# Altium PCB Reciever.PcbDoc
Units mm, origin at the board's own origin, x right, y up, seen from the top; angles counter-clockwise.
Board outline 152.4 x 101.6 mm, 2 copper layers (Top Layer, Bottom Layer); 50 components, 37 nets, 136 pads, 0 vias.
Unrouted connection lines stored in the file: 2.
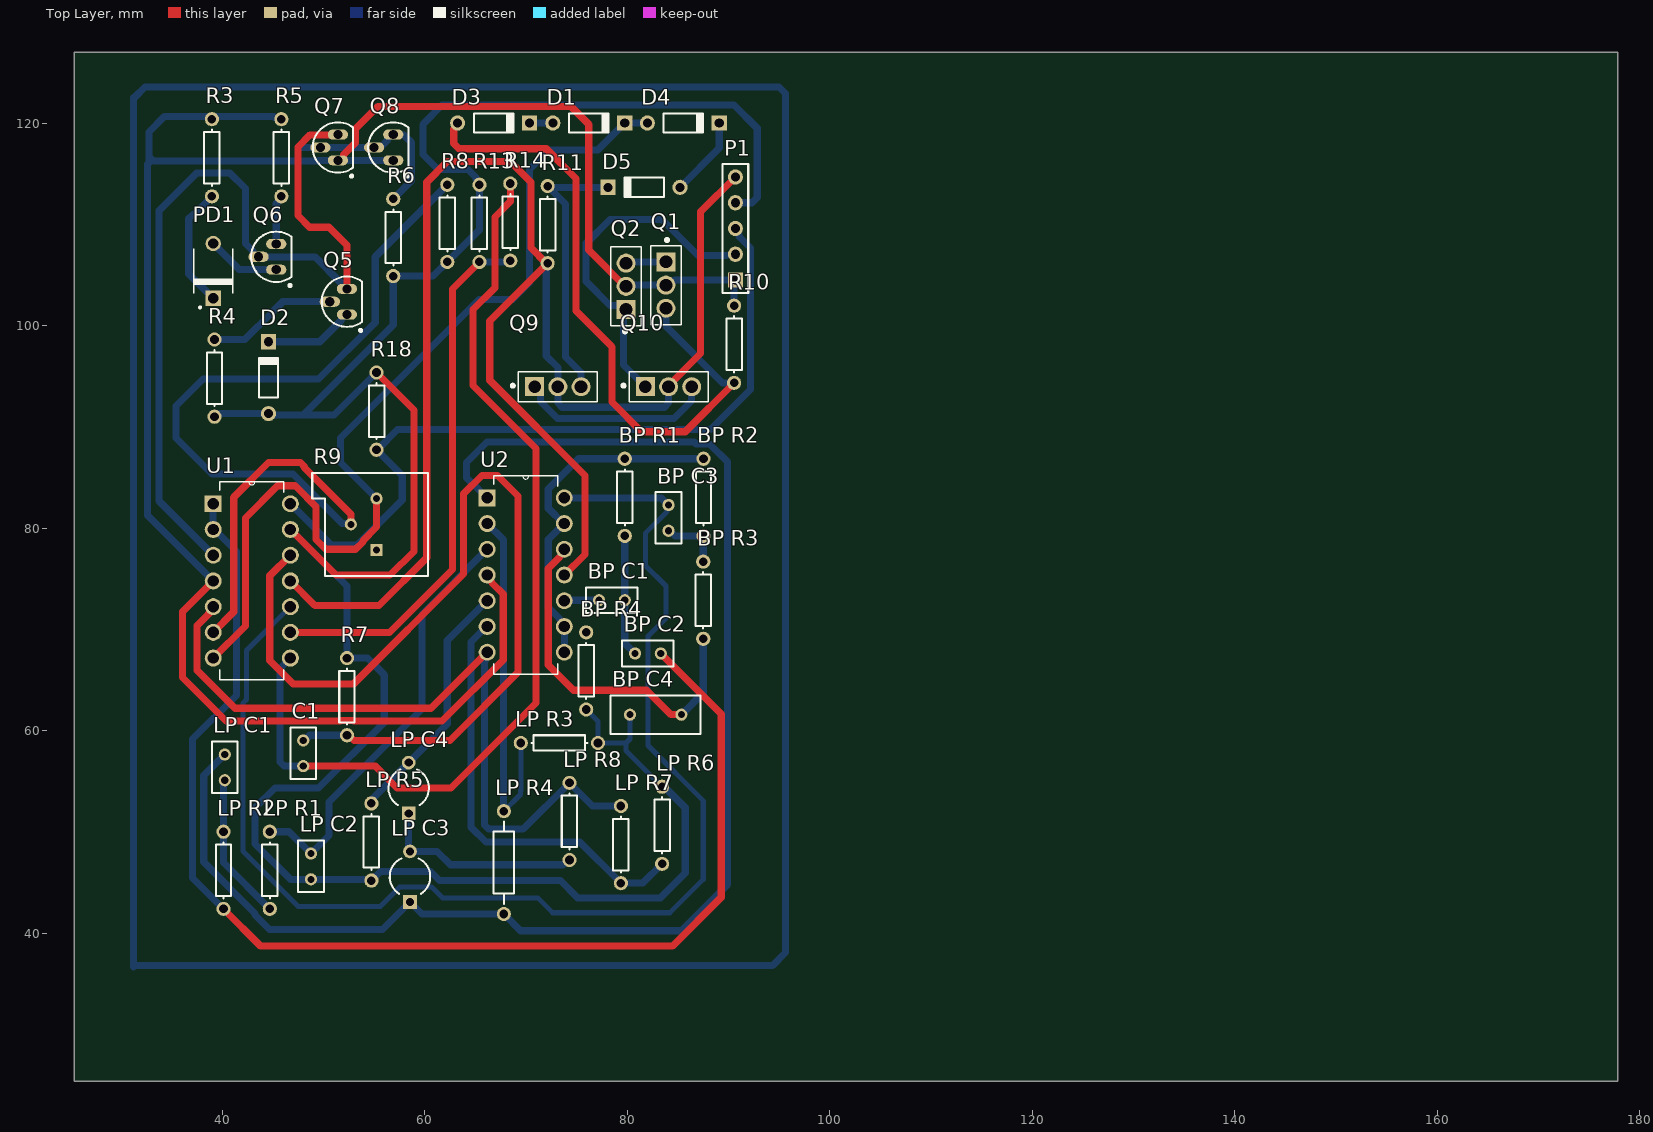
[diagram p0: Top Layer view]
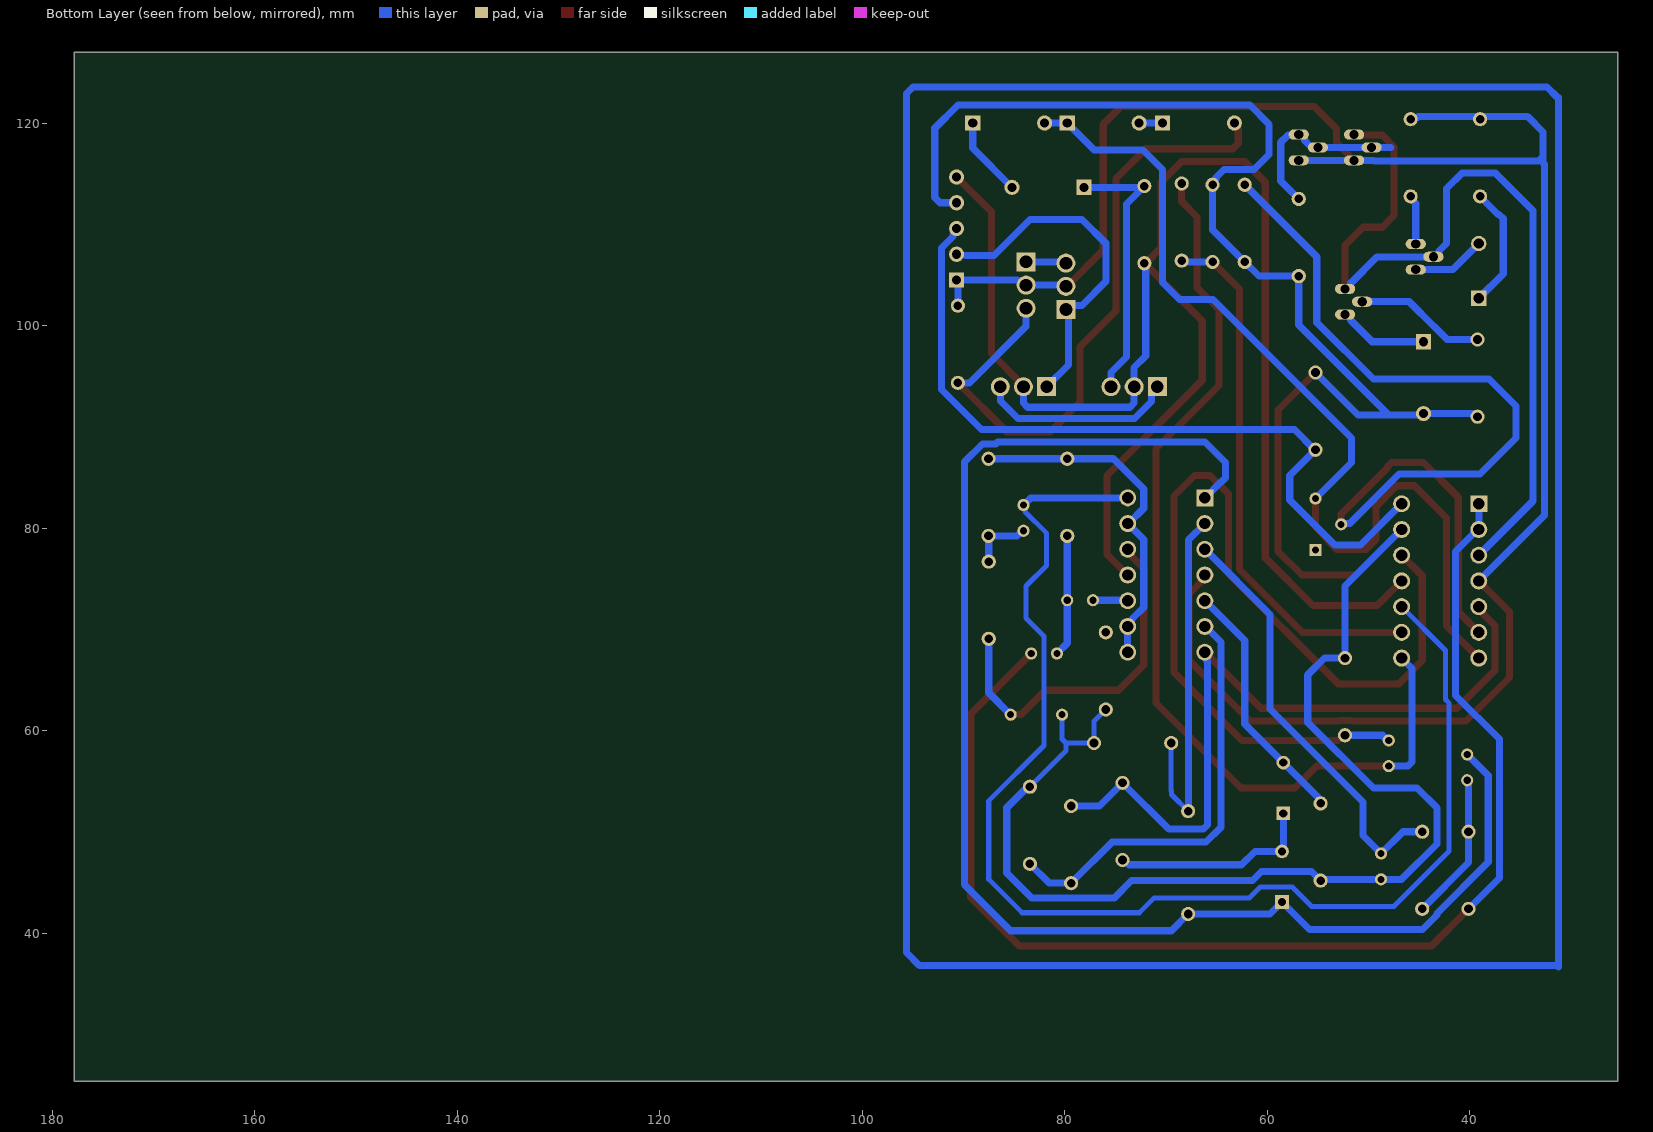
[diagram p1: Bottom Layer view, seen from below]

## Layer stack, top to bottom
Top Solder: solder mask 0.0102, Solder Resist, Dk 3.5
Top Layer: signal copper 0.0356
Dielectric 1: dielectric 0.32, FR-4, Dk 4.8
Bottom Layer: signal copper 0.0356
Bottom Solder: solder mask 0.0102, Solder Resist, Dk 3.5

## Board outline
25.4,25.4 177.8,25.4 177.8,127 25.4,127

## Design rules (kind name [scope] priority, off if disabled: settings)
Clearance [All] p1: gap=0.4 ignorepadtopadclearanceinfootprint=FALSE
PolygonConnect [All] p1: connectstyle=Relief reliefconductorwidth=0.254 reliefentries=4 polygonreliefangle="90 Angle" airgapwidth=0.254
RoutingVias [All] p1: holewidth=0.711 width=1.27 viastyle="Through Hole" minholewidth=0.711 minwidth=1.27 maxholewidth=0.711 maxwidth=1.27
SolderMaskExpansion [All] p1: expansion=0.102
Width [All] p1: maxlimit=1 minlimit=0.5 preferedwidth=0.7
30 further rules are at their usual default settings.

## Classes and differential pairs
component class Sheet3: "BP C1" "BP C2" "BP C3" "BP C4" "BP R1" "BP R2" "BP R3" "BP R4" C1 D1 D3 D4 D5 "LP C1" "LP C2" "LP C3" "LP C4" "LP R1" "LP R2" "LP R3" "LP R4" "LP R5" "LP R6" "LP R7" "LP R8" PD1 Q5 Q6 Q7 Q8 Q9 Q10 R7 R8 R9 R10 R11 R13 R14 R18

## Components (designator, comment, footprint, x,y, rotation, side; value= is the part's Value field where it differs from the comment)
"BP C1" "Cap" RAD-0.1 78.486,72.898 r0 top value=100pF
"BP C2" "Cap" RAD-0.1 82.042,67.639 r0 top value=100pF
"BP C3" "Cap" RAD-0.1 84.074,81.026 r270 top value=100pF
"BP C4" "Cap" RAD-0.2 82.804,61.595 r180 top value=100pF
"BP R1" "Res1" AXIAL-0.3 79.756,83.058 r90 top value=1K
"BP R2" "Res1" AXIAL-0.3 87.53,83.058 r90 top value=1K
"BP R3" "Res1" AXIAL-0.3 87.503,72.898 r90 top value=1K
"BP R4" "Res1" AXIAL-0.3 75.946,65.913 r90 top value=1K
C1 "Cap" RAD-0.1 48.006,57.785 r90 top value=100pF
D1 "Diode 1N4148" DO-35 76.2,120.015 r0 top
D2 "Diode 1N4148" DO-35 44.577,94.869 r90 top
D3 "Diode 1N4148" DO-35 66.802,120.015 r0 top
D4 "Diode 1N4148" DO-35 85.535,120.015 r0 top
D5 "Diode 1N4148" DO-35 81.661,113.665 r180 top
"LP C1" "Cap" RAD-0.1 40.259,56.388 r90 top value=100pF
"LP C2" "Cap" RAD-0.1 48.768,46.609 r90 top value=100pF
"LP C3" "Cap2" CAPR5-4X5 58.547,45.593 r90 top value=100pF
"LP C4" "Cap2" CAPR5-4X5 58.42,54.356 r90 top value=100pF
"LP R1" "Res1" AXIAL-0.3 44.704,46.228 r90 top value=1K
"LP R2" "Res1" AXIAL-0.3 40.132,46.228 r90 top value=1K
"LP R3" "Res1" AXIAL-0.3 73.299,58.801 r180 top value=1K
"LP R4" "Res1" AXIAL-0.4 67.818,46.99 r90 top value=1K
"LP R5" "Res1" AXIAL-0.3 54.737,49.022 r270 top value=1K
"LP R6" "Res1" AXIAL-0.3 83.439,50.673 r90 top value=1K
"LP R7" "Res1" AXIAL-0.3 79.375,48.768 r270 top value=1K
"LP R8" "Res1" AXIAL-0.3 74.295,51.054 r90 top value=1K
P1 "Header 5" HDR1X5 90.678,104.521 r90 top
PD1 "BPW34F" *PHODET_BPW34F_BPW34F(Primary) 39.116,105.41 r90 top
Q1 "BD135" *TO229P780X300X2000-3 83.82,106.303 r270 top
Q2 "BD135" *TO229P780X300X2000-3 79.883,101.6 r90 top
Q5 "2N3904" TO-92A#1 52.324,102.374 r0 top
Q6 "2N3904" TO-92A#2 45.339,106.807 r0 top
Q7 "2N3906" TO-92A#3 51.435,117.602 r0 top
Q8 "2N3906" TO-92A#4 56.896,117.602 r0 top
Q9 "BD136" *TO229P780X300X2000-3 70.858,93.98 r0 top
Q10 "BD136" *TO229P780X300X2000-3 81.788,93.98 r0 top
R3 "Res1" AXIAL-0.3 38.989,116.586 r90 top value=1K
R4 "Res1" AXIAL-0.3 39.243,94.826 r90 top value=1K
R5 "Res1" AXIAL-0.3 45.847,116.586 r90 top value=1K
R6 "Res1" AXIAL-0.3 56.896,108.712 r90 top value=1K
R7 "Res1" AXIAL-0.3 52.324,63.373 r270 top value=1K
R8 "Res1" AXIAL-0.3 62.23,110.109 r90 top value=1K
R9 "RPot" VR4 53.975,80.391 r90 top value=1K
R10 "Res1" AXIAL-0.3 90.551,98.171 r90 top value=1K
R11 "Res1" AXIAL-0.3 72.136,109.982 r90 top value=1K
R13 "Res1" AXIAL-0.3 65.405,110.109 r270 top value=1K
R14 "Res1" AXIAL-0.3 68.453,110.236 r90 top value=1K
R18 "Res1" AXIAL-0.3 55.245,91.567 r90 top value=1K
U1 "LM324N" *DIP254P762X508-14 46.736,67.183 r0 top
U2 "LM324N" *DIP254P762X508-14 73.787,67.766 r0 top

## Footprints (in the part's own frame and the unit in brackets; to place one, negate y for a bottom-side part, rotate by r counter-clockwise, add the part's x,y. Pads: shape width x height; smd on the part's side, far side on the other; paste and mask are expansions set on the pad)
*DIP254P762X508-14 [mil]
  rect 66x66 hole 44: 1(-300,600)
  round 66 hole 44: 2(-300,500) 3(-300,400) 4(-300,300) 5(-300,200) 6(-300,100) 7(-300,0) 8(0,0) 9(0,100) 10(0,200) 11(0,300) 12(0,400) 13(0,500) 14(0,600)
  silkscreen extent -275,-85 -25,685
*PHODET_BPW34F_BPW34F(Primary) [mm]
  round 1.508 hole 1: A(2.7,0)
  rect 1.508x1.508 hole 1: C(-2.7,0)
  silkscreen extent -3.7,-1.93 2.2,1.92
*TO229P780X300X2000-3 [mm]
  rect 1.875x1.875 hole 1.25: 1(0,0)
  round 1.875 hole 1.25: 2(2.29,0) 3(4.58,0)
  silkscreen extent -2.31,-1.5 6.19,1.5
AXIAL-0.3 [mm] "Axial Device, Thru-Hole; 2 Leads; 0.3 in Pin Spacing"
  round 1.4 hole 0.85: 1(-3.81,0) 2(3.81,0)
  silkscreen extent -2.77,-0.76 2.77,0.76
AXIAL-0.4 [mm] "Axial Device, Thru-Hole; 2 Leads; 0.4 in Pin Spacing"
  round 1.4 hole 0.85: 1(-5.08,0) 2(5.08,0)
  silkscreen extent -4.06,-1.02 4.06,1.02
CAPR5-4X5 [mm] "Capacitor; 2 Leads"
  rect 1.35x1.35 hole 0.8: 1(-2.5,0)
  round 1.35 hole 0.8: 2(2.5,0)
  silkscreen extent -1.69,-2 1.82,2
DO-35 [mm] "Diode, Axial; Body 3.8 x 1.9 mm (LxDia. max), Lead Dia. 0.53 mm (max)"
  round 1.5 hole 0.9: 1(-3.55,0)
  rect 1.5x1.5 hole 0.9: 2(3.55,0)
  silkscreen extent -1.95,-0.95 2.05,0.95
HDR1X5 [mm] "Connector; Header; 5 Position"
  rect 1.5x1.5 hole 0.9: 1(0,0)
  round 1.5 hole 0.9: 2(2.54,0) 3(5.08,0) 4(7.62,0) 5(10.16,0)
  silkscreen extent -1.27,-1.27 11.43,1.27
RAD-0.1 [mm] "Radial Cap, Thru-Hole; 2 Leads; 0.1 in Pin Spacing"
  round 1.2 hole 0.7: 1(-1.27,0) 2(1.27,0)
  silkscreen extent -2.54,-1.27 2.54,1.27
RAD-0.2 [mm] "Radial Cap, Thru-Hole; 2 Leads; 0.2 in Pin Spacing"
  round 1.2 hole 0.7: 1(-2.54,0) 2(2.54,0)
  silkscreen extent -4.44,-1.91 4.44,1.91
TO-92A#1 [mm] "TO, Flat Index; 3 In-Line, Axial Leads; Body Dia. 4.5mm; Leads 0.51 x 0.48 mm (max)"
  oval 2x1 hole 0.9: 1(0,-1.27) 2(-1.695,0) 3(0,1.27)
  silkscreen extent -2.48,-2.95 1.5,2.48, body extent -2.48,-2.5 1.5,2.5, height 6.86
TO-92A#2 [mm] "TO, Flat Index; 3 In-Line, Axial Leads; Body Dia. 4.5mm; Leads 0.51 x 0.48 mm (max)"
  oval 2x1 hole 0.9: 1(0,-1.27) 2(-1.745,0) 3(0,1.27)
  silkscreen extent -2.48,-2.95 1.5,2.48, body extent -2.48,-2.5 1.5,2.5, height 6.86
TO-92A#3 [mm] "TO, Flat Index; 3 In-Line, Axial Leads; Body Dia. 4.5mm; Leads 0.51 x 0.48 mm (max)"
  oval 2x1 hole 0.9: 1(0,-1.27) 2(-1.73,0) 3(0,1.27)
  silkscreen extent -2.48,-2.95 1.5,2.48, body extent -2.48,-2.5 1.5,2.5, height 6.86
TO-92A#4 [mm] "TO, Flat Index; 3 In-Line, Axial Leads; Body Dia. 4.5mm; Leads 0.51 x 0.48 mm (max)"
  oval 2x1 hole 0.9: 1(0,-1.27) 2(-1.896,0) 3(0,1.27)
  silkscreen extent -2.48,-2.95 1.5,2.48, body extent -2.48,-2.5 1.5,2.5, height 6.86
VR4 [mm] "Thru-Hole; 3 Leads"
  rect 1.2x1.2 hole 0.7: 1(-2.54,-1.27)
  round 1.2 hole 0.7: 2(0,1.27) 3(2.54,-1.27)
  silkscreen extent -5.08,-6.35 5.08,5.08

## Part data
"BP C1" "BP C2" "BP C3" "BP C4" C1 "LP C1" "LP C2" "LP C3" "LP C4": "Capacitor", Publisher="Altium Limited"
  "BP C1" "BP C2" "BP C3" "BP C4" C1 "LP C1" "LP C2": LatestRevisionDate=17-Jul-2002, LatestRevisionNote="Re-released for DXP Platform.", PackageDescription="Radial Cap, Thru-Hole; 2 Leads; 0.3 in Pin Spacing", PackageReference=RAD-0.3, Published=8-Jun-2000
  "LP C3" "LP C4": PackageDescription="Capacitor; 2 Leads", PackageReference=CAPR5-4X5, Published=23-Sep-2002
"BP R1" "BP R2" "BP R3" "BP R4" "LP R1" "LP R2" "LP R3" "LP R4" "LP R5" "LP R6" "LP R7" "LP R8" R3 R4 R5 R6 R7 R8 R10 R11 R13 R14 R18: "Resistor", LatestRevisionDate=17-Jul-2002, LatestRevisionNote="Re-released for DXP Platform.", PackageDescription="Axial Device, Thru-Hole; 2 Leads; 0.3 in Pin Spacing", PackageReference=AXIAL-0.3, Published=8-Jun-2000, Publisher="Altium Limited"
D1 D2 D3 D4 D5: "High Conductance Fast Diode", Code_JEDEC=DO-204-AH, ComponentLink1Description="Manufacturer Link", ComponentLink1URL=http://www.fairchildsemi.com/, ComponentLink2Description=Datasheet, ComponentLink2URL=http://www.fairchildsemi.com/ds/1N%2F1N4148.pdf, DatasheetVersion=1997, LatestRevisionDate=17-Jul-2002, LatestRevisionNote="Re-released for DXP Platform.", PackageDescription="Diode, Axial; Body 3.8 x 1.9 mm (LxDia. max), Lead Dia. 0.53 mm (max)", PackageReference=DO-35, Published=8-Jun-2000, Publisher="Altium Limited"
P1: "Header, 5-Pin", LatestRevisionDate=17-Jul-2002, LatestRevisionNote="Re-released for DXP Platform.", Publisher="Altium Limited"
PD1: "Photodiode PIN Chip 950nm 0.59A/W Sensitivity Automotive 2-Pin PDIL", Package="DIP-2 OSRAM", Availability=Unavailable, MF="OSRAM Opto", MP=BPW34F, Price=None, SnapEDA_Link=https://www.snapeda.com/parts/BPW34F/OSRAM%20Opto%20Semiconductors%20Inc./view-part/?ref=snap
Q1 Q2: "Trans GP BJT NPN 45V 1.5A 3-Pin TO-126", Package="TO-126-3 NXP Semiconductors", Availability=Unavailable, MF="ON Semiconductor", MP=BD135, Price=None, SnapEDA_Link=https://www.snapeda.com/parts/BD135/ON%20Semiconductor/view-part/?ref=snap
Q5 Q6: "NPN General Purpose Amplifier", ComponentLink1Description="Manufacturer Link", ComponentLink1URL=http://www.fairchildsemi.com/, ComponentLink2Description=Datasheet, ComponentLink2URL=http://www.fairchildsemi.com/ds/2N%2F2N3904.pdf, DatasheetVersion=1997, LatestRevisionDate=15-Jan-2003, LatestRevisionNote="PCB Footprint 'BCY-W3/D4.7' replaced", PackageDescription="TO, Flat Index; 3 In-Line, Axial Leads; Body Dia. 4.5mm; Leads 0.51 x 0.48 mm (max)", PackageReference=TO-92A, PackageVersion=Sep-1998, Published=8-Jun-2000, Publisher="Altium Limited"
Q7 Q8: "PNP General Purpose Amplifier", ComponentLink1Description="Manufacturer Link", ComponentLink1URL=http://www.fairchildsemi.com/, ComponentLink2Description=Datasheet, ComponentLink2URL=http://www.fairchildsemi.com/ds/2N%2F2N3906.pdf, DatasheetVersion=1997, LatestRevisionDate=15-Jan-2003, LatestRevisionNote="PCB Footprint 'BCY-W3/D4.7' replaced", PackageDescription="TO, Flat Index; 3 In-Line, Axial Leads; Body Dia. 4.5mm; Leads 0.51 x 0.48 mm (max)", PackageReference=TO-92A, PackageVersion=Sep-1998, Published=8-Jun-2000, Publisher="Altium Limited"
Q9 Q10: "Bipolar Transistor, PNP, -45V", Package="TO-126 Multicomp", Availability=Unavailable, MF="ON Semiconductor", MP=BD136, Price=None, SnapEDA_Link=https://www.snapeda.com/parts/BD136/ON%20Semiconductor/view-part/?ref=snap
R9: "Potentiometer", LatestRevisionDate=17-Jul-2002, LatestRevisionNote="Re-released for DXP Platform.", PackageDescription="Variable Resistor, Thru-Hole; 3 Leads", PackageReference=VR5, Published=8-Jun-2000, Publisher="Altium Limited", Set Position=0.5, Sim Note="Enter the Resistance value and the set point into parameter fields."
U1 U2: "Ic Opamp Gp 1.2mhz 14dip", Package="PDIP-14 Motorola", Availability=Unavailable, MF="ON Semiconductor", MP=LM324N, Price=None, SnapEDA_Link=https://www.snapeda.com/parts/LM324N/ON%20Semiconductor/view-part/?ref=snap

## Nets (pads, with @x,y where several pads share a name; then routed paths per layer and width w, separated by ;. In a path a pad name is that pad's centre, name@x,y a point inside that pad or via, vN(x,y) a via of type N, cw(c..) or ccw(c..) an arc to the next point about the centre after c; other vN are vias at no path point)
Audio: P1.2 Q2.1 Q10.1 | length 34.6
  Bottom Layer w0.7: Q10.1@82.375,94.567 Q10.1 79.629,96.139 79.629,101.346 Q2.1 79.496,101.987 78.31,101.987 75.946,104.351 75.946,108.141 78.295,110.49 83.439,110.49 86.995,106.934 89.789,106.934
"BP U1 +": "BP C1.1" "BP R4.2" U2.10 | length 3.8
  Bottom Layer w0.7: U2.10 73.839,72.898 77.216,72.898 ; 75.757,69.723 75.946,69.723 75.946,69.912
"BP U1 -": "BP R1.2" "BP R2.2" U2.8 U2.9 U2.13 | length 34.7
  Bottom Layer w0.7: U2.8 U2.9 73.787,70.57 73.299,71.058 73.299,71.088 72.199,72.188 72.199,78.877 U2.13 73.712,80.466 72.199,81.979 72.199,83.883 75.184,86.868 79.756,86.868 87.53,86.868
"BP U2 +": "BP C4.1" "BP R3.1" U2.12 | length 35.7
  Top Layer w0.7: U2.12 73.787,77.661 73.299,77.173 73.299,77.144 72.199,76.043 72.199,66.485 74.676,64.008 81.915,64.008 84.328,61.595 85.344,61.595
  Bottom Layer w0.7: 85.344,61.595 87.503,63.754 87.503,69.088
"BP U2 -": "BP C3.1" U1.10 U2.14 | length 130
  Top Layer w0.7: U1.10 U1.10@46.879,72.12
  Bottom Layer w0.5: U1.10 42.402,67.929 42.402,63.086 42.037,62.721 42.037,48.133 47.498,42.672 55.626,42.672 57.531,44.577 60.689,44.577 61.758,43.508 71.173,43.508 72.644,42.037 84.201,42.037 87.503,45.339 87.503,53.086 82.042,58.547 82.042,69.342 83.82,71.12 83.82,74.295 81.788,76.327 81.788,79.502 83.94,81.654 83.94,82.162 84.074,82.296
  Bottom Layer w0.7: U1.10@46.472,72.263 U1.10 ; U2.14@73.576,83.006 U2.14 83.364,83.006 84.074,82.296
Data: P1.3 R18.1 U1.14 | length 76.5
  Bottom Layer w0.7: U1.14 50.8,78.359 53.34,78.359 57.785,82.804 57.785,85.217 R18.1 55.327,87.757 57.322,89.752 88.228,89.752 92.178,93.702 92.178,107.682 91.041,108.819 91.041,109.021 90.678,109.385 P1.3
GND: "BP C4.2" "BP R4.1" "LP C2.1" "LP R3.1" "LP R5.2" "LP R6.2" D2.1 P1.4 R4.1 R6.1 R7.1 R8.1 R13.1 R18.2 U1.13 | length 253.5
  Top Layer w0.7: U1.13 51.233,75.386 56.59,75.386 58.928,77.724 58.928,91.694 R18.2
  Bottom Layer w0.5: 75.946,62.103 77.109,60.94 77.109,58.801 79.883,58.801 ; 80.264,61.595 80.264,59.182 79.883,58.801 ; 83.439,54.483 79.883,58.039 79.883,58.801
  Bottom Layer w0.7: R4.1 39.432,91.016 39.735,91.319 D2.1 ; D2.1@44.577,91.192 48.012,91.192 ; U1.13 52.324,74.295 R7.1 54.356,67.183 56.007,65.532 56.007,60.833 49.53,54.356 45.212,54.356 43.254,52.398 43.254,48.821 46.736,45.339 48.768,45.339 54.61,45.339 54.737,45.212 55.626,46.101 60.579,46.101 61.468,45.212 73.406,45.212 75.11,43.508 83.259,43.508 85.725,45.974 85.725,52.408 84,54.133 83.978,54.133 83.628,54.483 83.439,54.483 ; R18.2 51.06,91.192 48.012,91.192 ; P1.4 92.329,112.141 92.837,112.649 92.837,119.507 90.551,121.793 61.722,121.793 59.817,119.888 59.817,116.924 61.298,115.443 64.262,115.443 65.058,114.647 65.058,114.455 65.405,114.108 R13.1 65.405,109.474 R8.1 60.833,104.902 R6.1 56.896,100.076 48.012,91.192
"LP U1 +": "LP C2.2" "LP R1.2" U2.3 | length 42.2
  Bottom Layer w0.7: 44.704,50.038 46.609,50.038 48.768,47.879 50.546,49.657 50.546,52.959 59.733,62.146 59.733,71.492 U2.3
"LP U1 -": "LP R3.2" "LP R4.2" U2.2 | length 36.5
  Bottom Layer w0.5: 67.818,52.07 69.469,53.721 69.469,54.102 69.489,54.122 69.489,58.801
  Bottom Layer w0.7: U2.2 67.799,78.834 67.799,52.089 67.818,52.07
"LP U1 out": "LP C1.2" "LP C3.1" "LP R4.1" U2.1 | length 143.7
  Bottom Layer w0.7: 40.259,57.658 38.184,55.583 38.184,47.033 43.254,41.963 43.254,41.817 44.685,40.386 55.84,40.386 58.547,43.093 59.73,41.91 67.818,41.91 69.469,40.259 85.344,40.259 89.916,44.831 89.916,86.533 88.131,88.318 86.815,88.318 86.614,88.519 66.167,88.519 64.135,86.487 64.135,84.992 64.545,84.582 64.591,84.582 U2.1
"LP U2 +": "LP C4.2" "LP R5.1" U2.5 | length 24.7
  Bottom Layer w0.7: 54.737,52.832 54.871,52.966 54.871,53.307 58.42,56.856 62.23,60.666 62.23,68.909 U2.5
"LP U2 -": "LP R6.1" "LP R7.2" U2.6 | length 42.5
  Bottom Layer w0.7: U2.6 66.113,70.306 64.579,68.771 64.579,50.481 66.037,49.022 75.311,49.022 79.375,44.958 81.534,44.958 83.439,46.863
"LP U2 out": "LP R7.1" "LP R8.2" U1.5 U2.7 | length 73.3
  Top Layer w0.7: U1.5 39.116,71.999 38.628,71.511 38.628,71.481 37.528,70.381 37.528,65.976 41.274,62.23 60.631,62.23 U2.7
  Bottom Layer w0.7: U2.7@65.903,67.766 U2.7 65.98,67.579 65.98,66.935 65.913,66.867 65.913,50.702 66.323,50.292 69.723,50.292 74.295,54.864 76.581,52.578 79.375,52.578
"NetBP C1_2": "BP C1.2" "BP C2.1" "BP R1.1" | length 12
  Bottom Layer w0.7: 79.756,79.248 79.756,72.898 79.756,68.655 80.772,67.639
"NetBP C3_2": "BP C3.2" "BP R2.1" "BP R3.2" | length 6.2
  Bottom Layer w0.7: 84.074,79.756 84.209,79.756 84.717,79.248 87.53,79.248 87.503,79.221 87.503,76.708
NetD1_1: D1.1 D3.2 | length 2.3
  Bottom Layer w0.7: D3.2 D1.1
NetD2_2: D2.2 Q5.1 | length 9.1
  Bottom Layer w0.7: D2.2 49.639,98.419 51.767,100.546 51.767,100.965 51.905,101.104 Q5.1
NetD3_1: D3.1 Q1.3 R10.1 | length 65.3
  Top Layer w0.7: D3.1 63.252,119.799 62.865,119.412 62.865,117.983 63.373,117.475 72.009,117.475 74.93,114.554 74.93,101.473 78.486,97.917 78.486,92.456 81.407,89.535 85.725,89.535 R10.1
  Bottom Layer w0.7: Q1.3 83.82,99.949 89.408,94.361 R10.1
NetD4_2: D4.2 D5.1 | length 8
  Bottom Layer w0.7: D5.1 89.085,117.539 D4.2
NetD5_2: D5.2 Q9.3 R11.2 | length 27
  Bottom Layer w0.7: R11.2 R11.2@72.263,113.665 ; Q9.3 75.431,93.987 75.431,95.384 73.914,96.901 73.914,112.014 R11.2@72.263,113.665 ; D5.2 R11.2@72.263,113.665
"NetLP C1_1": "LP C1.1" "LP R1.1" "LP R2.2" | length 14.6
  Bottom Layer w0.7: 40.259,55.118 40.259,54.983 40.132,54.856 40.132,50.038 40.132,46.99 44.704,42.418
"NetLP C3_2": "LP C3.2" "LP C4.1" "LP R8.1" | length 20.3
  Bottom Layer w0.7: 58.42,51.856 58.42,48.396 58.547,48.269 58.547,48.093 61.222,48.093 62.536,46.779 73.641,46.779 74.106,47.244 74.295,47.244
NetPD1_A: PD1.A Q5.2 Q6.1 R4.2 | length 20.4
  Bottom Layer w0.7: R4.2@38.989,98.806 R4.2@39.123,98.94 ; PD1.A 41.689,105.537 Q6.1 ; R4.2 42.233,98.636 43.516,99.919 43.531,99.919 45.986,102.374 Q5.2
NetPD1_C: PD1.C R3.1 | length 12.1
  Bottom Layer w0.7: R3.1 37.211,110.998 37.113,110.998 36.703,110.588 36.703,105.123 PD1.C
NetQ1_1: Q1.1 Q2.3 | length 4
  Bottom Layer w0.7: Q2.3 80.006,106.303 Q1.1
NetQ6_3: Q6.3 R5.1 | length 4.9
  Bottom Layer w0.7: Q6.3 45.339,112.079 45.847,112.587 R5.1
NetQ7_2: Q7.2 Q8.2 Q8.3 R6.2 | length 18.3
  Bottom Layer w0.7: 47.8,117.602 Q8.2 55.581,117.602 55.731,117.752 55.776,117.752 56.339,118.315 56.339,118.733 56.477,118.872 Q8.3 56.953,118.815 57.969,118.815 58.674,118.11 58.674,114.3 R6.2
NetQ9_1: Q9.1 Q10.3 | length 19.4
  Bottom Layer w0.7: Q9.1 71.445,93.393 71.445,92.509 73.102,90.852 84.629,90.852 86.357,92.58 86.357,93.969 Q10.3
"U4 -": R8.2 R9.2 U1.6 | length 93.9
  Top Layer w0.7: U1.6 41.148,71.755 41.148,83.058 44.577,86.487 47.723,86.487 48.133,86.077 48.133,85.979 52.705,81.407 R9.2
  Bottom Layer w0.7: R9.2 52.619,80.477 51.857,80.477 46.99,85.344 38.989,85.344 35.433,88.9 35.433,92.075 38.1,94.742 49.53,94.742 55.118,100.33 55.118,106.807 R8.2
"U4 out": D1.2 D4.1 R9.3 U1.7 | length 95
  Top Layer w0.7: U1.7 42.291,70.358 42.291,81.026 45.466,84.201 47.2,84.201 47.39,84.011 47.394,84.011 49.276,82.129 49.276,78.899 50.244,77.93 53.165,77.93 53.895,78.66 53.895,78.762 55.245,80.112 R9.3 R9.3@55.159,83.017
  Bottom Layer w0.7: R9.3 51.689,86.487 51.689,88.9 65.372,102.583 68.674,102.583 70.352,104.261 70.352,115.437 72.263,117.348 77.083,117.348 D1.2 D4.1
"U5 +": Q5.3 Q6.2 Q7.3 U1.3 | length 86.9
  Top Layer w0.7: Q7.3 51.415,118.852 48.687,118.852 47.498,117.663 47.498,110.871 48.641,109.728 50.546,109.728 52.324,107.95 Q5.3
  Bottom Layer w0.7: U1.3 33.782,82.677 33.782,111.379 37.465,115.062 40.767,115.062 42.291,113.538 42.291,108.11 43.037,107.364 43.037,106.946 43.175,106.807 Q6.2 49.161,106.807 51.767,104.201 51.767,103.782 51.905,103.644 Q5.3 52.743,103.644 Q5.3@52.881,103.782
"U5 -": "BP C2.2" "LP R2.1" U1.1 U1.2 | length 123.3
  Top Layer w0.7: 40.132,42.418 43.815,38.735 84.455,38.735 89.281,43.561 89.281,61.67 83.312,67.639
  Bottom Layer w0.7: U1.1 U1.2 39.243,79.883 41.402,77.724 41.402,63.5 37.084,59.182 37.084,45.466 40.132,42.418
"U6 -": R13.2 R14.1 U1.9 | length 53.4
  Top Layer w0.7: U1.9 56.515,69.723 62.738,75.946 62.738,103.632 R13.2
  Bottom Layer w0.7: U1.9 U1.9@46.923,69.91 ; R13.2 68.326,106.299 R14.1
"U6 out": C1.1 R14.2 U1.8 | length 95.9
  Top Layer w0.7: C1.1 55.118,56.515 57.277,54.356 62.611,54.356 70.993,62.738 70.993,87.884 64.77,94.107 64.77,101.596 66.929,103.755 66.929,110.744 68.453,112.268 R14.2
  Bottom Layer w0.7: U1.8 45.72,66.167 45.72,56.925 46.13,56.515 C1.1
"U7 +": C1.2 R7.2 U1.12 | length 92.5
  Top Layer w0.7: U1.12 44.704,75.311 44.704,66.929 46.99,64.643 52.991,64.643 63.838,75.49 63.838,83.414 65.641,85.217 67.183,85.217 69.215,83.185 69.215,65.786 62.484,59.055 53.021,59.055 52.513,59.563 R7.2
  Bottom Layer w0.7: C1.2 48.141,59.055 48.649,59.563 R7.2
VCC: P1.1 Q1.2 Q2.2 Q7.1 Q8.1 R3.2 R5.2 R10.2 U1.4 U2.4 | length 201.1
  Top Layer w0.7: U1.4 36.068,71.755 36.068,65.278 40.386,60.96 51.67,60.96 51.723,61.013 52.925,61.013 52.978,60.96 61.722,60.96 67.755,66.993 67.755,73.503 66.655,74.604 66.655,74.633 66.167,75.121 U2.4 ; Q7.1 51.854,116.332 51.992,116.471 51.992,116.889 53.185,118.082 53.185,119.479 55.372,121.666 74.422,121.666 76.2,119.888 76.2,107.477 79.787,103.89 Q2.2
  Bottom Layer w0.7: U1.4 32.639,81.28 32.639,115.951 32.766,116.078 32.766,116.713 ; R5.2 45.713,120.53 45.218,120.53 45.098,120.65 34.29,120.65 32.766,119.126 32.766,116.713 ; Q8.1 Q7.1 49.53,116.332 49.473,116.275 33.204,116.275 32.766,116.713 ; Q2.2 80.006,104.013 Q1.2 84.138,104.013 84.646,104.521 P1.1 90.551,104.394 R10.2
VEE: P1.5 Q9.2 Q10.2 R11.1 U1.11 U2.11 | length 163.1
  Top Layer w0.7: U1.11 49.149,72.39 55.499,72.39 60.198,77.089 60.198,114.173 62.23,116.205 68.453,116.205 70.485,114.173 70.485,107.696 72.009,106.172 R11.1 66.421,100.457 66.421,94.615 75.819,85.217 75.819,77.418 U2.11 ; Q10.2 84.078,94.076 87.249,97.247 87.249,111.252 P1.5
  Bottom Layer w0.7: U1.11 U1.11@46.863,74.803 ; R11.1 72.002,106.038 72.002,97.027 73.148,95.881 Q9.2 73.148,92.362 73.558,91.952 83.668,91.952 84.078,92.362 Q10.2 ; P1.5 P1.5@90.805,114.554
pads on no net: R9.1
copper on no net: | length 300.6
  Bottom Layer w0.7: 31.242,122.555 31.242,36.703 31.369,36.83 94.361,36.83 95.631,38.1 95.631,122.936 94.996,123.571 32.385,123.571 31.369,122.555

## Text inside footprints (layer, text, board x,y; h text height)
Q9: Mechanical 15 "1" at 68.317,96.651 h1.88; Mechanical 15 "2" at 70.35,96.651 h1.88; Mechanical 15 "3" at 72.639,96.649 h1.88; Mechanical 15 "1" at 68.317,96.651 h1.88; Mechanical 15 "2" at 70.35,96.651 h1.88; Mechanical 15 "3" at 72.639,96.649 h1.88
Q10: Mechanical 15 "1" at 79.247,96.651 h1.88; Mechanical 15 "2" at 81.28,96.651 h1.88; Mechanical 15 "3" at 83.569,96.649 h1.88; Mechanical 15 "1" at 79.247,96.651 h1.88; Mechanical 15 "2" at 81.28,96.651 h1.88; Mechanical 15 "3" at 83.569,96.649 h1.88